# Altium PCB Mini_System.PcbDoc
Units mm, origin at the board's own origin, x right, y up, seen from the top; angles counter-clockwise.
Board outline 100 x 100 mm, 2 copper layers (Top Layer, Bottom Layer); 52 components, 62 nets, 208 pads, 18 vias.
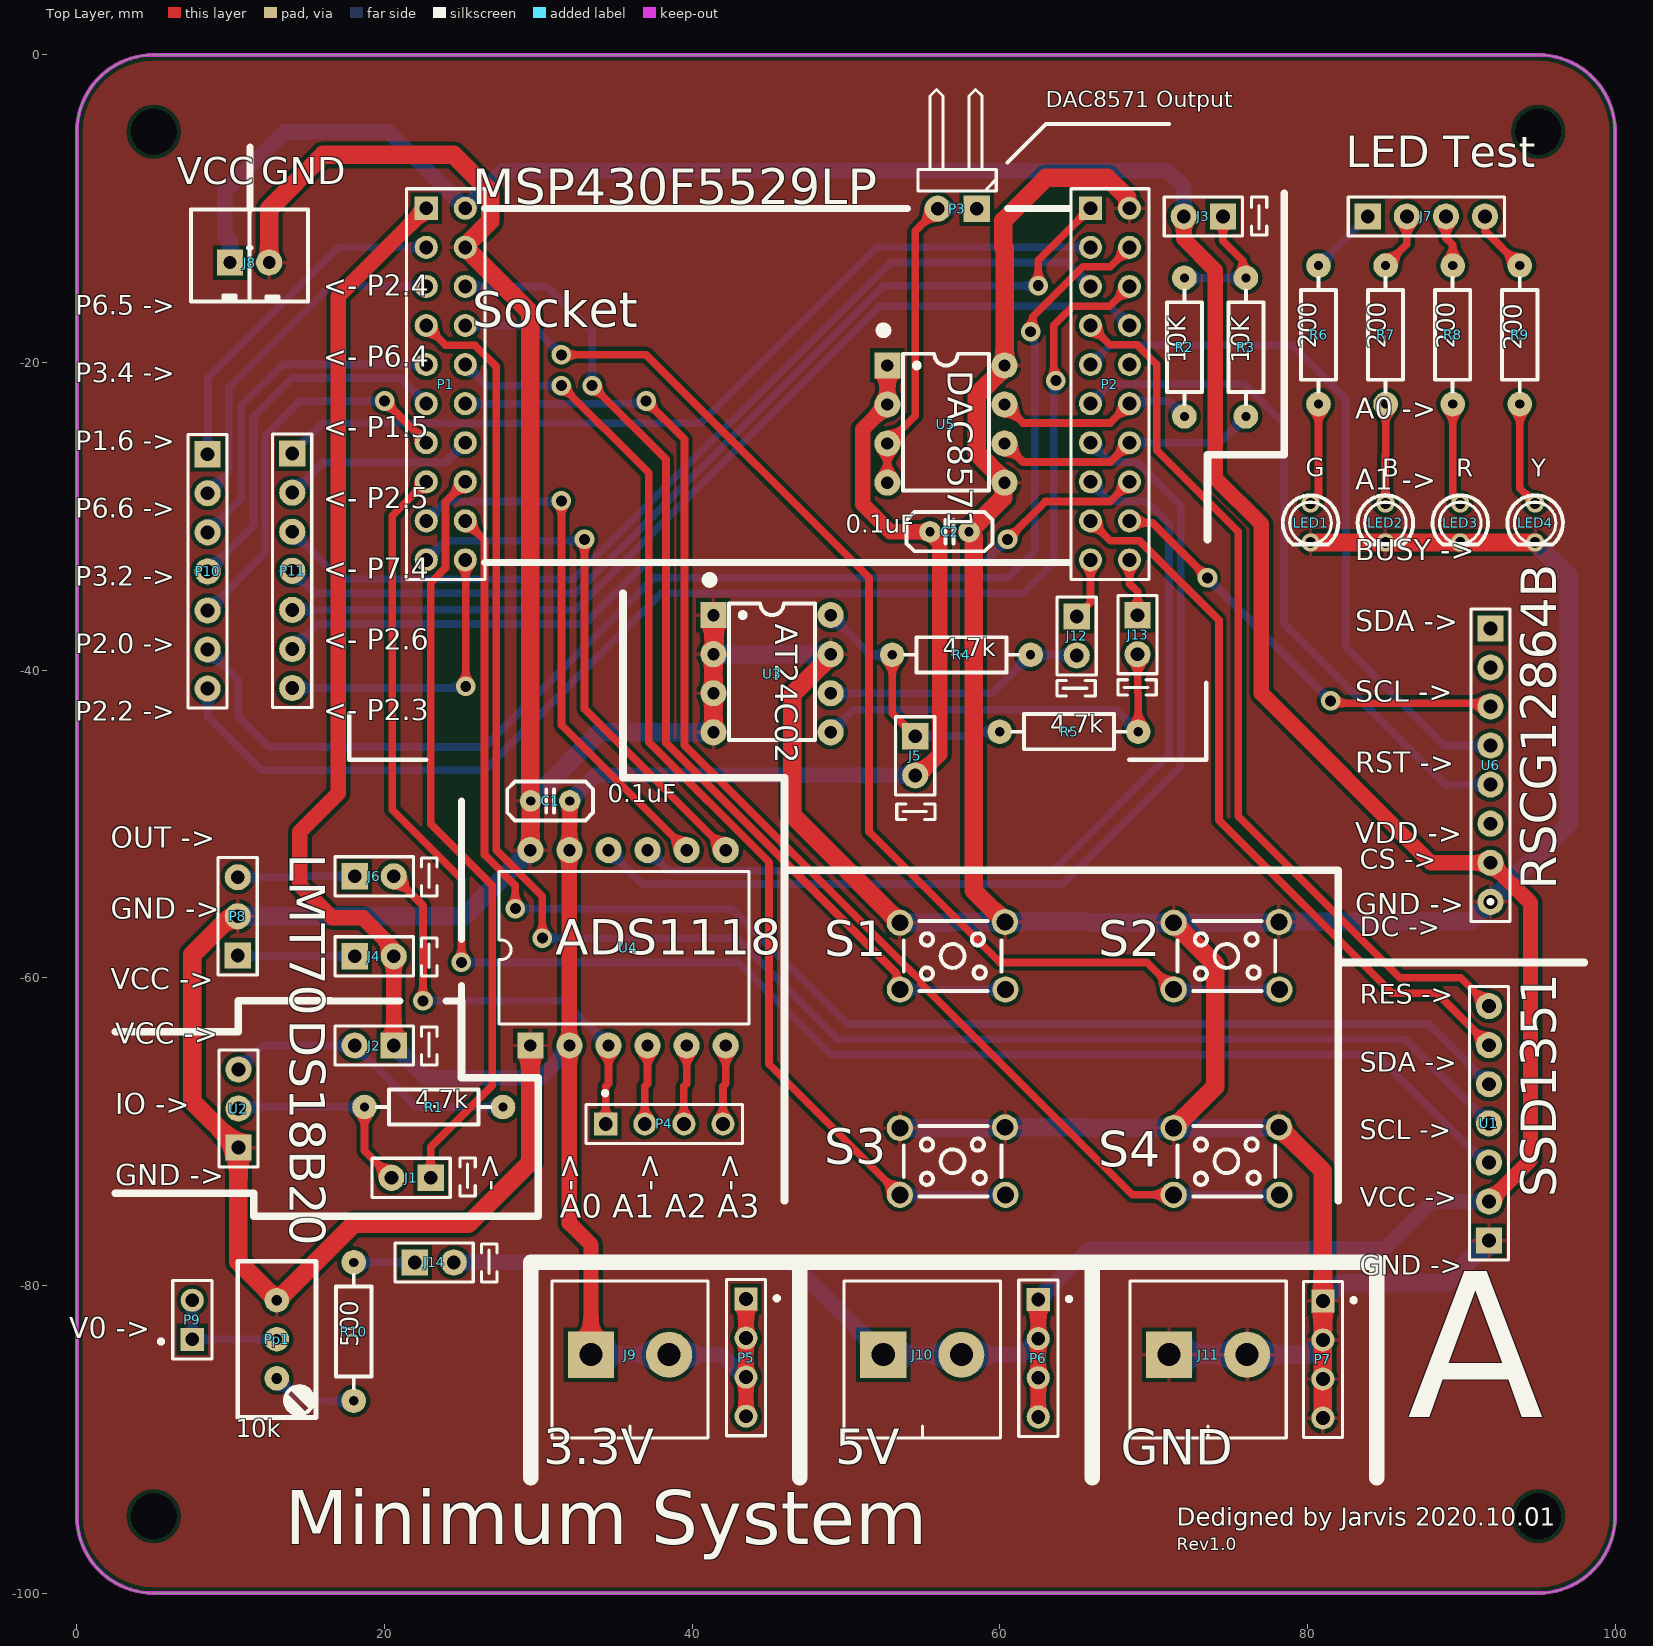
[diagram p0: Top Layer view]
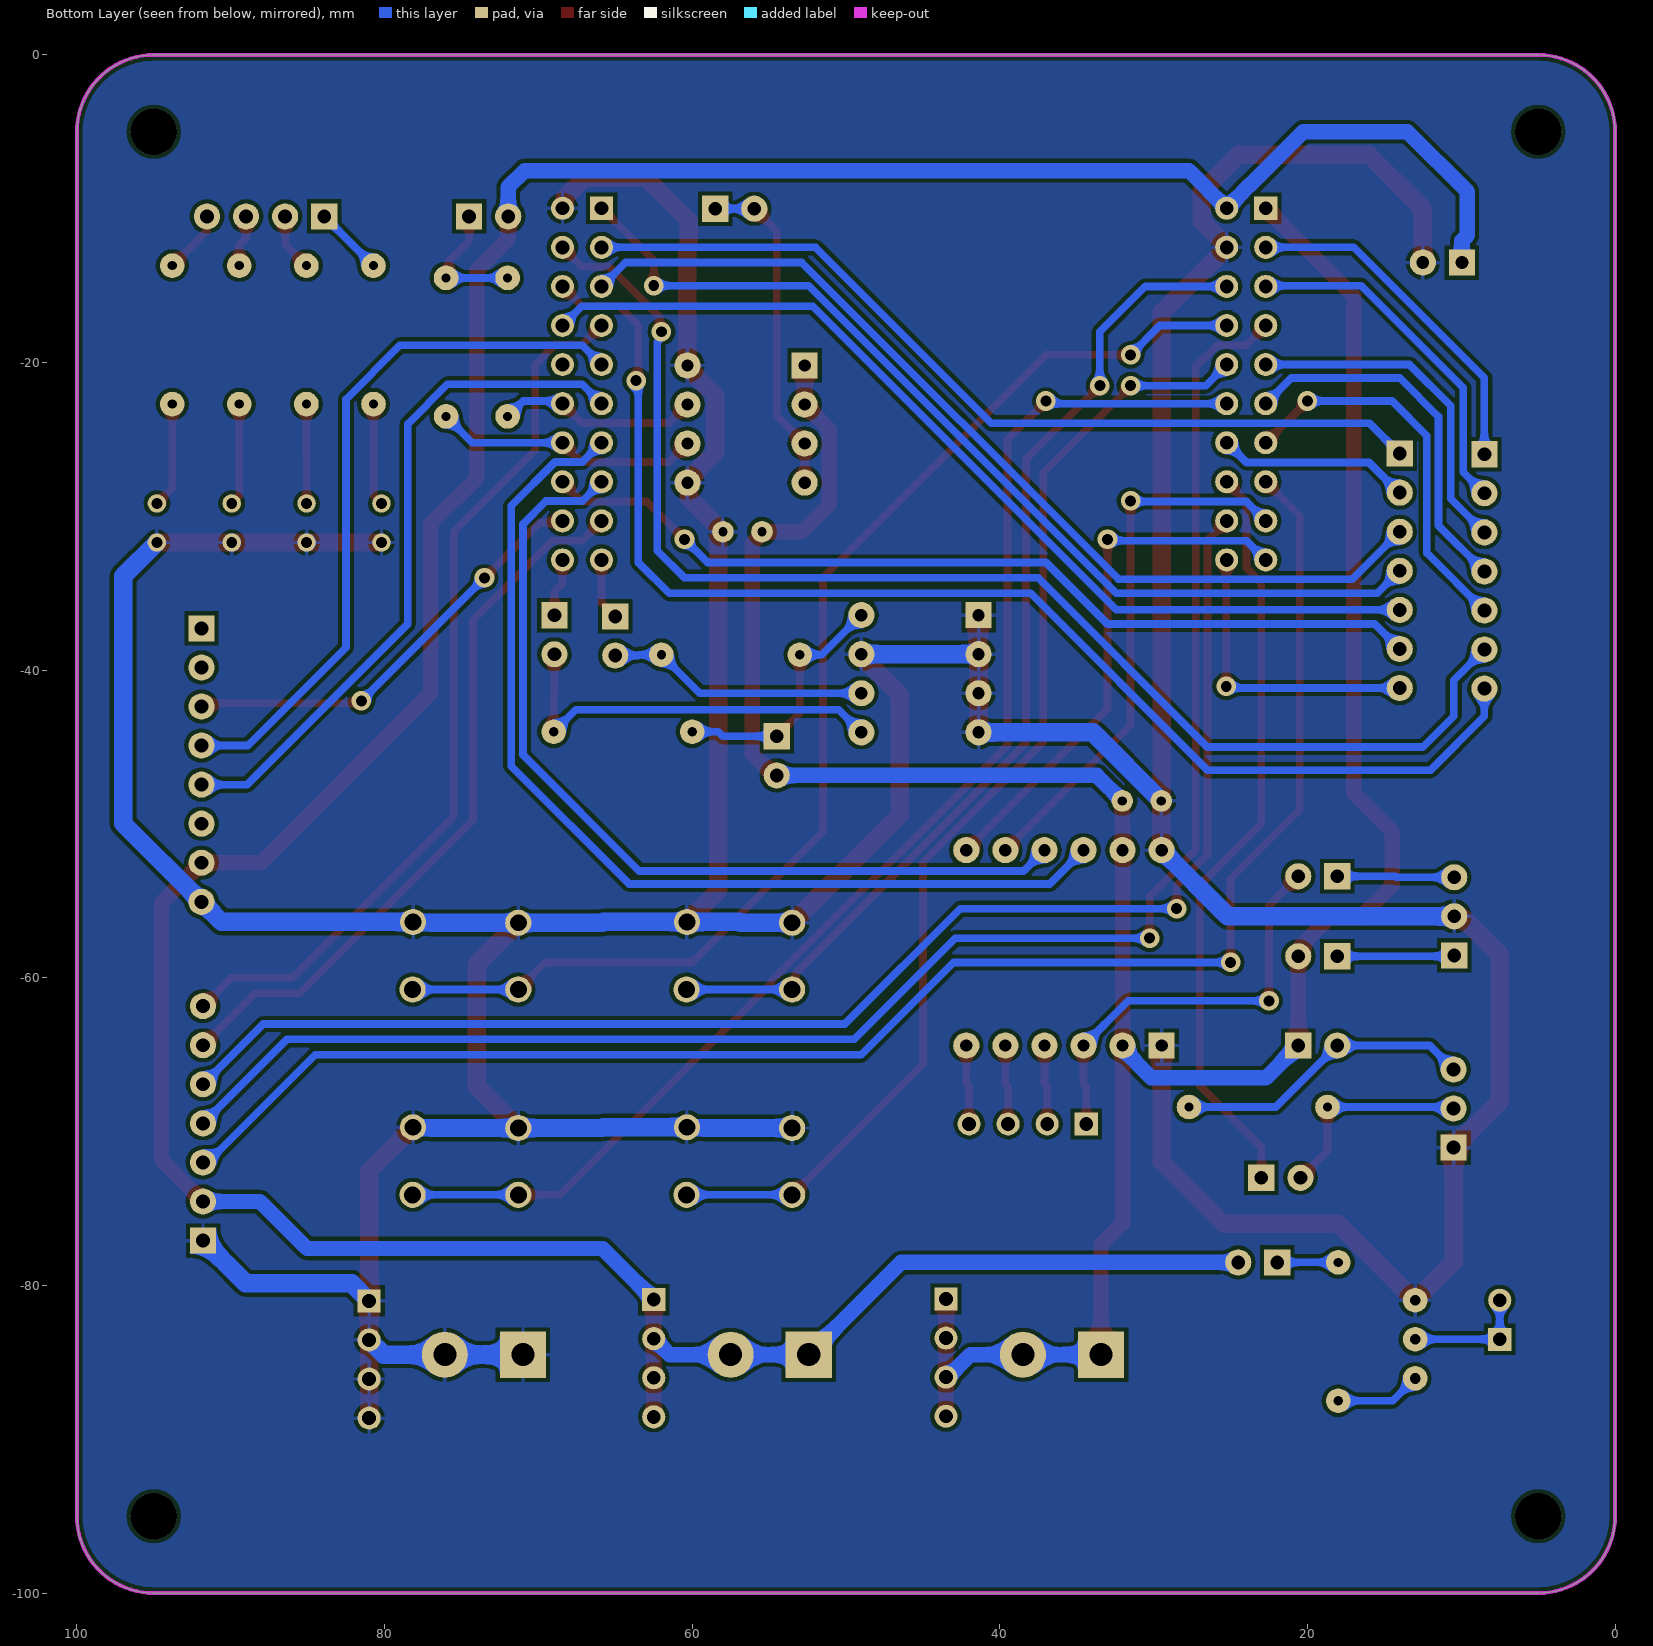
[diagram p1: Bottom Layer view, seen from below]

## Layer stack, top to bottom
Top Solder: solder mask 0.0102, Solder Resist, Dk 3.5
Top Layer: signal copper 0.0356
Dielectric 1: dielectric 0.32, FR-4, Dk 4.8
Bottom Layer: signal copper 0.0356
Bottom Solder: solder mask 0.0102, Solder Resist, Dk 3.5

## Board outline
5,-100 cw(c5,-95) 0,-95 0,-5 cw(c5,-5) 5,0 95,0 cw(c95,-5) 100,-5 100,-95 cw(c95,-95) 95,-100

## Design rules (kind name [scope] priority, off if disabled: settings)
Clearance [All] p1: gap=0.254 ignorepadtopadclearanceinfootprint=FALSE except(0: Arc-Hole Track-Hole SMDPad-Hole THPad-Hole Via-Hole Fill-Hole Poly-Hole Region-Hole Text-Hole)
PolygonConnect [All] p1: connectstyle=Relief reliefconductorwidth=0.254 reliefentries=4 polygonreliefangle="90 Angle" airgapwidth=0.254
RoutingVias [All] p1: holewidth=0.711 width=1.27 viastyle="Through Hole" minholewidth=0.711 minwidth=1.27 maxholewidth=0.711 maxwidth=1.27
SolderMaskExpansion [All] p1: expansion=0.102 istentingtop=FALSE
Width Width_3 [InNet('GND')] p1: maxlimit=1.2 minlimit=1.2 preferedwidth=1.2
Width Width_2 [InNet('5V')] p2: maxlimit=1 minlimit=1 preferedwidth=1
Width Width_1 [InNet('3V3')] p3: maxlimit=1 minlimit=1 preferedwidth=1
Width [All] p4: maxlimit=0.5 minlimit=0.5 preferedwidth=0.5
30 further rules are at their usual default settings.

## Components (designator, comment, footprint, x,y, rotation, side; value= is the part's Value field where it differs from the comment)
C1 "0.1uF" Capacitor-Disk-Middle 32.04,-48.5 r180 top locked value=100nF
C2 "0.1uF" Capacitor-Disk-Middle 58,-31 r180 top locked value=100nF
J1 "Jump" HDR-1x2 23,-73 r180 top locked
J2 "Jump" HDR-1x2 20.6,-64.4 r180 top locked
J3 "Jump" HDR-1x2 74.5,-10.5 r180 top locked
J4 "Jump" HDR-1x2 18.06,-58.6 r0 top locked
J5 "Jump" HDR-1x2 54.5,-44.3 r270 top locked
J6 "Jump" HDR-1x2 18.06,-53.4 r0 top locked
J7 "LED测试口" HDR-1X4_M 83.92,-10.5 r0 top locked
J8 "电源输入" XH2.54-2P 11.23,-13.5 r0 top locked
J9 "3.3V" WJ500V-5.08-2 35.96,-84.5 r0 top locked
J10 "5V" WJ500V-5.08-2 54.96,-84.5 r0 top locked
J11 "GND" WJ500V-5.08-2 73.54,-84.5 r0 top locked
J12 "Jump" HDR-1x2 65,-36.5 r270 top locked
J13 "Jump" HDR-1x2 68.957,-36.425 r270 top locked
J14 "Jump" HDR-1x2 21.96,-78.5 r0 top locked
LED1 "G" LED-R3-H5-SINGLE-G 80.2,-29.16 r270 top locked
LED2 "B" LED-R3-H5-SINGLE-B 85.067,-29.16 r270 top locked
LED3 "R" LED-R3-H5-SINGLE-R 89.933,-29.16 r270 top locked
LED4 "Y" LED-R3-H5-SINGLE-Y 94.8,-29.16 r270 top locked
P1 "Header 10X2" HDR2X10 22.711,-9.972 r270 top locked
P2 "Header 10X2" HDR2X10 65.891,-9.972 r270 top locked
P3 "DAC8571_Output" HDR-1X2_H 58.5,-10 r180 top locked
P4 "Header 4" HDR1X4 34.38,-69.5 r0 top locked
P5 "3.3V电源输出" HDR1X4 43.5,-80.88 r270 top locked
P6 "5V电源输出" HDR1X4 62.5,-80.92 r270 top locked
P7 "GND" HDR1X4 81,-81 r270 top locked
P8 "LMT70" HDR-1X3_M 10.457,-58.54 r90 top locked
P9 "Header 2" HDR1X2 7.5,-83.5 r90 top locked
P10 "Header 7" HDR-1X7_M 8.5,-25.96 r270 top locked
P11 "Header 7" HDR-1X7_M 14,-25.92 r270 top locked
Pp1 "10k" RP_3296 13,-86.04 r180 top locked
R1 "4.7k" "RS 1/4W" 23.2,-68.4 r180 top locked value=1K
R2 "10K" "RS 1/4W" 72,-19 r90 top locked value=1K
R3 "10K" "RS 1/4W" 76,-19 r90 top locked value=1K
R4 "4.7k" "RS 1/4W" 57.5,-39 r180 top locked value=1K
R5 "4.7k" "RS 1/4W" 64.5,-44 r180 top locked value=1K
R6 "200" "RS 1/4W" 80.72,-18.2 r90 top locked value=1K
R7 "200" "RS 1/4W" 85.08,-18.2 r90 top locked value=1K
R8 "200" "RS 1/4W" 89.44,-18.2 r90 top locked value=1K
R9 "200" "RS 1/4W" 93.8,-18.2 r90 top locked value=1K
R10 "500" "RS 1/4W" 18,-83 r270 top locked value=1K
S1 "S1" BUTTON_6*6 53.5,-56.42 r0 top locked
S2 "S2" BUTTON_6*6 71.304,-56.42 r0 top locked
S3 "S3" BUTTON_6*6 53.5,-69.763 r0 top locked
S4 "S4" BUTTON_6*6 71.304,-69.763 r0 top locked
U1 "SSD1351" HDR-1X7_M 91.8,-77.08 r90 top locked
U2 "DS18B20" HDR-1X3_Y 10.5,-71.04 r90 top locked
U3 "AT24C02" DIP8-300_MH 45.19,-40.23 r0 top locked
U4 "ADS1118" DIP12 29.48,-64.4 r90 top locked
U5 "DAC8571" DIP8-300_MH 56.5,-24 r0 top locked
U6 "RSCG12864B" HDR-1X8_M 91.9,-37.28 r270 top locked

## Footprints (in the part's own frame and the unit in brackets; to place one, negate y for a bottom-side part, rotate by r counter-clockwise, add the part's x,y. Pads: shape width x height; smd on the part's side, far side on the other; paste and mask are expansions set on the pad)
BUTTON_6*6 [mm] "轻触按键"
  round 1.7 hole 1.1: 1(0,0) 1(6.842,0.051) 2(0,-4.343) 2(6.867,-4.343)
  silkscreen extent 0.25,-4.44 6.6,0.13, body extent -0.48,-5.01 7.49,0.99, height 5.26
Capacitor-Disk-Middle [mm]
  round 1.4 hole 0.6: 1(0,0) 2(2.54,0)
  silkscreen extent -1.52,-1.27 4.06,1.27, body extent -1.23,-1.1 3.77,1, height 7
DIP8-300_MH [mm] "带底座 9.4*7.6*3.8(长宽高）"
  rect 1.7x1.7 hole 0.8: 1(-3.81,3.81)
  round 1.7 hole 0.8: 2(-3.81,1.27) 3(-3.81,-1.27) 4(-3.81,-3.81) 5(3.81,-3.81) 6(3.81,-1.27) 7(3.81,1.27) 8(3.81,3.81)
  silkscreen extent -4.32,-4.32 2.79,6.35, body extent -5,-5.19 5,5.19, height 7.7
DIP12 [mm]
  rect 1.7x1.7 hole 0.8: 1(0,0)
  round 1.7 hole 0.8: 2(0,-2.54) 3(0,-5.08) 4(0,-7.62) 5(0,-10.16) 6(0,-12.7) 7(12.7,-12.7) 8(12.7,-10.16) 9(12.7,-7.62) 10(12.7,-5.08) 11(12.7,-2.54) 12(12.7,0)
  silkscreen extent 1.4,-14.22 11.3,2.04
HDR1X2 [mm] "Connector; Header; 2 Position"
  rect 1.5x1.5 hole 0.9: 1(0,0)
  round 1.5 hole 0.9: 2(2.54,0)
  silkscreen extent -1.27,-1.27 3.81,2.17, body extent -1.27,-1.27 3.81,1.27, height 8.54
HDR1X4 [mm] "Connector; Header; 4 Position"
  rect 1.5x1.5 hole 0.9: 1(0,0)
  round 1.5 hole 0.9: 2(2.54,0) 3(5.08,0) 4(7.62,0)
  silkscreen extent -1.27,-1.27 8.89,2.14, body extent -1.27,-1.27 8.89,1.27, height 8.54
HDR2X10 [mm] "Connector; Header; 10x2 Position"
  rect 1.5x1.5 hole 0.9: 1(0,0)
  round 1.5 hole 0.9: 2(0,2.54) 3(2.54,0) 4(2.54,2.54) 5(5.08,0) 6(5.08,2.54) 7(7.62,0) 8(7.62,2.54) 9(10.16,0) 10(10.16,2.54) 11(12.7,0) 12(12.7,2.54) 13(15.24,0) 14(15.24,2.54) 15(17.78,0) 16(17.78,2.54) 17(20.32,0) 18(20.32,2.54) 19(22.86,0) 20(22.86,2.54)
  silkscreen extent -1.27,-1.27 24.13,3.81, body extent -1.27,-1.27 24.13,3.81, height 8.54
HDR-1x2 [mm] "排针，2脚"
  rect 1.7x1.7 hole 0.9: 1(0,0)
  round 1.7 hole 0.9: 2(2.54,0)
  silkscreen extent -1.27,-1.27 3.81,1.27, body extent -1.27,-1.27 3.81,1.27, height 8.5
HDR-1X2_H [mm] "弯脚排针，2脚"
  rect 1.7x1.7 hole 0.9: 1(0,0)
  round 1.7 hole 0.9: 2(2.54,0)
  silkscreen extent -1.27,-7.76 3.81,-1.14, body extent -1.27,-7.77 3.81,1.27, height 4.85
HDR-1X3_M [mm] "排母，3脚"
  rect 1.7x1.7 hole 0.9: 1(0,0)
  round 1.7 hole 0.9: 2(2.54,0) 3(5.08,0)
  silkscreen extent -1.27,-1.27 6.35,1.27, body extent -1.27,-1.27 6.35,1.27, height 8.5
HDR-1X3_Y [mm] "圆孔排母，3脚"
  rect 1.7x1.7 hole 0.9: 1(0,0)
  round 1.7 hole 0.9: 2(2.54,0) 3(5.08,0)
  silkscreen extent -1.27,-1.27 6.35,1.27, body extent -1.27,-1.27 6.35,1.27, height 4.31
HDR-1X4_M [mm] "排母，4脚"
  rect 1.7x1.7 hole 0.9: 1(0,0)
  round 1.7 hole 0.9: 2(2.54,0) 3(5.08,0) 4(7.62,0)
  silkscreen extent -1.27,-1.27 8.89,1.27, body extent -1.27,-1.27 8.89,1.27, height 8.5
HDR-1X7_M [mm] "排母，7脚"
  rect 1.7x1.7 hole 0.9: 1(0,0)
  round 1.7 hole 0.9: 2(2.54,0) 3(5.08,0) 4(7.62,0) 5(10.16,0) 6(12.7,0) 7(15.24,0)
  silkscreen extent -1.27,-1.27 16.51,1.27, body extent -1.27,-1.27 16.51,1.27, height 8.5
HDR-1X8_M [mm] "排母，8脚"
  rect 1.7x1.7 hole 0.9: 1(0,0)
  round 1.7 hole 0.9: 2(2.54,0) 3(5.08,0) 4(7.62,0) 5(10.16,0) 6(12.7,0) 7(15.24,0) 8(17.78,0)
  silkscreen extent -1.27,-1.27 19.05,1.27, body extent -1.27,-1.27 19.05,1.27, height 8.5
LED-R3-H5-SINGLE-B [mm]
  round 1.2 hole 0.7: 1(0,0) 2(2.54,0)
  silkscreen extent -0.53,-1.8 2.68,1.8, body extent -0.73,-2 2.79,2, height 5.2
LED-R3-H5-SINGLE-G [mm]
  round 1.2 hole 0.7: 1(0,0) 2(2.54,0)
  silkscreen extent -0.53,-1.8 2.68,1.8, body extent -0.73,-2 2.79,2, height 5.2
LED-R3-H5-SINGLE-R [mm]
  round 1.2 hole 0.7: 1(0,0) 2(2.54,0)
  silkscreen extent -0.53,-1.8 2.68,1.8, body extent -0.73,-2 2.79,2, height 5.2
LED-R3-H5-SINGLE-Y [mm]
  round 1.2 hole 0.7: 1(0,0) 2(2.54,0)
  silkscreen extent -0.53,-1.8 2.68,1.8, body extent -0.73,-2 2.79,2, height 5.2
RP_3296 [mm] "电位器"
  round 1.6 hole 0.7: 1(0,0) 2(0,-2.54) 3(0,-5.08)
  silkscreen extent -2.54,-7.62 2.54,2.54, body extent -2.41,-7.23 2.39,2.3, height 11.55
"RS 1/4W" [mm] "直插色环电阻，脚距9mm，直径2.3mm"
  round 1.6 hole 0.6: 1(-4.5,0) 2(4.5,0)
  silkscreen extent -3.68,-1.14 3.68,1.14, body extent -4.72,-1.16 4.73,1.16, height 2.32
WJ500V-5.08-2 [mm]
  rect 3x3 hole 1.5: 1(-2.54,0)
  round 3 hole 1.5: 2(2.54,0)
  silkscreen extent -5.08,-5.41 5.08,4.8, body extent -5.67,-4.8 5.07,4.7, height 15
XH2.54-2P [mm]
  rect 1.7x1.7 hole 0.83: 1(-1.27,0)
  round 1.7 hole 0.83: 2(1.27,0)
  silkscreen extent -3.81,-2.54 3.79,3.46, body extent -3.72,-2.37 3.68,3.38, height 7

## Part data
C1 C2: library part "Cap Nicklon", "CBB聚乙烯薄膜电容", Voltage=63V, Published=8-Jun-2000, Publisher="Altium Limited", Revision="July-2002: Re-released for DXP Platform.", 实物样品照片=https://item.taobao.com/item.htm?spm=a230r.1.14.32.21fd24b7VWml4d&id=37914290992&ns=1&abbucket=13#detail
J7: library part HDR1X4, "排针", SuppliersPartNumber=C57369, ComponentLink1Description=供应商链接, ComponentLink1URL=http://www.szlcsc.com/product/details_58403.html, price=0.2, Supplier=LC
J8: library part CON2, "连接器"
J9 J10 J11: library part KF128-5.08MM-2P, "接线端子", ComponentLink1Description=供应商链接, ComponentLink1URL=https://detail.tmall.com/item.htm?spm=a1z10.5-b.w4011-14865958799.193.B0p41N&id=45905508377&rn=e90e7252b5175cd006380c5c01151190&abbucket=9, price=0.5, Supplier=Farpu
LED1: library part LED-3-G, "Typical INFRARED GaAs LED", Published=8-Jun-2000, Publisher="Altium Limited", Revision="July-2002: Re-released for DXP Platform."
LED2: library part LED-3-B, "Typical INFRARED GaAs LED", Published=8-Jun-2000, Publisher="Altium Limited", Revision="July-2002: Re-released for DXP Platform."
LED3: library part LED-3-R, "Typical INFRARED GaAs LED", Published=8-Jun-2000, Publisher="Altium Limited", Revision="July-2002: Re-released for DXP Platform."
LED4: library part LED-3-Y, "Typical INFRARED GaAs LED", Published=8-Jun-2000, Publisher="Altium Limited", Revision="July-2002: Re-released for DXP Platform."
P1 P2: "Header, 10-Pin, Dual row", LatestRevisionDate=17-Jul-2002, LatestRevisionNote="Re-released for DXP Platform.", Publisher="Altium Limited"
P3: library part "Header 2", "Header, 2-Pin", LatestRevisionDate=17-Jul-2002, LatestRevisionNote="Re-released for DXP Platform.", Publisher="Altium Limited"
P4: "Header, 4-Pin", LatestRevisionDate=17-Jul-2002, LatestRevisionNote="Re-released for DXP Platform.", Publisher="Altium Limited"
P5 P6 P7: library part "Header 4", "Header, 4-Pin", LatestRevisionDate=17-Jul-2002, LatestRevisionNote="Re-released for DXP Platform.", Publisher="Altium Limited"
P8: library part "Header 3", "Header, 3-Pin", LatestRevisionDate=17-Jul-2002, LatestRevisionNote="Re-released for DXP Platform.", Publisher="Altium Limited"
P9: "Header, 2-Pin", LatestRevisionDate=17-Jul-2002, LatestRevisionNote="Re-released for DXP Platform.", Publisher="Altium Limited"
P10 P11: "Header, 7-Pin", LatestRevisionDate=17-Jul-2002, LatestRevisionNote="Re-released for DXP Platform.", Publisher="Altium Limited"
Pp1: library part RP_3296, "3296电位器", 购买链接=https://item.taobao.com/item.htm?spm=a230r.1.14.90.21641e34zQj3ul&id=19303265869&ns=1&abbucket=13#detail
R1 R2 R3 R4 R5 R6 R7 R8 R9 R10: library part Res2, "Resistor", LatestRevisionDate=17-Jul-2002, LatestRevisionNote="Re-released for DXP Platform.", PackageDescription="Axial Device, Thru-Hole; 2 Leads; 0.4 in Pin Spacing", PackageReference=AXIAL-0.4, Published=8-Jun-2000, Publisher="Altium Limited"
S1 S2 S3 S4: library part SW-PB, "Tactile Switch触觉开关", LatestRevisionDate=17-Jul-2002, LatestRevisionNote="Re-released for DXP Platform.", PackageReference=SPST-2, Published=24-Mar-1999, Publisher="Altium Limited"
U1: library part "1.5'OLED RGB SSD1351", "1.5寸彩色OLED"
U3: library part AT24C02BN-SP25-B, "2Kbit (256 x 8), 2-wire Bus Automotive Serial EEPROM with full memory Write Protect, 2.5V, 8-Pin SOIC, Bulk", Code_IPC=SOIC127P600-8, Code_JEDEC=MS-012-AA, ComponentLink1Description="Manufacturer Link", ComponentLink1URL=http://www.atmel.com/products/serial/default.asp, ComponentLink2Description=Datasheet, ComponentLink2URL=http://www.atmel.com/dyn/resources/prod_documents/doc8517.pdf, ComponentLink3Description="Atmel.com Home", ComponentLink3URL=http://www.atmel.com, DatasheetVersion="8517C,  Jan-2009", PackageDescription="8-Lead (0.150\" Wide Body), Plastic Gull Wing Small Outline (JEDEC SOIC)", PackageReference=8S1, PackageVersion="revC, Mar-2005", Published=20-Sep-2010, Publisher="Altium Limited"
U4: "16位ADC芯片，将模拟电压信号转化为数字信号供单片机处理"
U5: "16位DAC芯片，将数字量转化为模拟电压输出"

## Free pads (board coordinates)
  round 3 hole 3: 1(5,-95) 1(5,-5) 1(95,-95) 1(95,-5)

## Via types
v1: diameter 1.27, hole 0.711, Top Layer to Bottom Layer, 18 vias

## Nets (pads, with @x,y where several pads share a name; then routed paths per layer and width w, separated by ;. In a path a pad name is that pad's centre, name@x,y a point inside that pad or via, vN(x,y) a via of type N, cw(c..) or ccw(c..) an arc to the next point about the centre after c; other vN are vias at no path point)
3V3: C1.1 C2.2 J2.1 J4.2 J5.2 J9.1 J9.2 P1.1 P5.1 P5.2 P5.3 P5.4 U4.2 U4.11 U5.1 U5.2 | length 184.6
  Top Layer w1: J2.1 J4.2 20.466,-58.466 20.466,-57.966 18.606,-56.106 16.606,-56.106 14.5,-54 14.5,-50.5 17,-48 17,-15.683 P1.1 ; C1.1 32.04,-50.094 32.02,-50.114 U4.11 32,-51.72 32,-64.38 U4.2 32.02,-75.943 33.42,-77.343 J9.1 ; P5.4 P5.3 P5.2 P5.1 ; U5.1 U5.2 51.079,-24.341 51.079,-29.21 52.869,-31 C2.2 55.46,-31.108 56.104,-31.752 56.104,-45.462 55.567,-45.999 55.53,-45.999 54.689,-46.84 J5.2
  Bottom Layer w1: J2.1 22.7,-66.5 30.146,-66.5 31.179,-65.467 31.179,-65.43 32.02,-64.589 U4.2 ; C1.1 33.7,-46.84 J5.2 ; J9.1 J9.2 41.905,-84.5 43.365,-85.96 P5.3
5V: J3.2 J8.1 J10.1 J10.2 J14.2 P1.2 P6.1 P6.2 P6.3 P6.4 U1.2 U6.7 | length 231.4
  Top Layer w1: P6.4 P6.3 P6.2 P6.1 ; J3.2 71.96,-11.96 74,-14 74,-27.5 77,-30.5 77,-41.5 88.02,-52.52 U6.7 94.5,-55.12 94.5,-71.84 U1.2
  Bottom Layer w1: J8.1 9.96,-12.082 9.609,-11.732 9.609,-8.891 13.5,-5 20.279,-5 23.747,-8.468 23.773,-8.468 24.215,-8.91 24.215,-8.936 P1.2 27.702,-7.521 70.882,-7.521 71.96,-8.599 J3.2 ; J14.2 46.42,-78.5 J10.1 J10.2 61.46,-84.5 P6.2 ; P6.1 65.823,-77.597 85.039,-77.597 88.096,-74.54 U1.2
GND: C1.2 C2.1 J8.2 J11.1 J11.2 LED1.2 LED2.2 LED3.2 LED4.2 P1.4 P2.2 P7.1 P7.2 P7.3 P7.4 P8.2 Pp1.3 S1.1 S2.1 S3.1 S4.1 U1.1 U2.1 U3.1 U3.2 U3.3 U3.4 U3.7 U4.1 U4.12 U5.5 U5.8 U6.8 | length 416
  Top Layer w1.2: P8.2 10.361,-56.096 9.904,-56.096 7.5,-58.5 7.5,-68.04 U2.1 10.5,-78.46 Pp1.3 13.04,-80.96 18,-76 25.46,-76 29.48,-71.98 U4.1 ; J8.2 12.5,-10 16,-6.5 24.5,-6.5 26.873,-8.873 26.873,-10.809 25.251,-12.431 P1.4 29.465,-16.726 29.465,-48.465 C1.2 29.5,-50.094 29.48,-50.114 U4.12 ; U3.4 U3.3 U3.2 41.429,-38.911 41.429,-36.469 U3.1 ; U3.7 49,-39.09 46.5,-41.59 46.5,-49.42 S1.1@53.5,-56.42 ; S1.1@60.342,-56.369 58.297,-54.324 58.297,-31.351 58,-31.054 C2.1 60.214,-28.786 60.214,-27.906 U5.5 60.31,-27.68 58.5,-25.87 58.5,-22.13 60.31,-20.32 60.31,-12.544 60.233,-12.467 60.233,-10.767 63,-8 67,-8 68.281,-9.281 68.281,-9.741 68.431,-9.891 P2.2 ; S4.1@71.304,-69.763 74,-67.067 74,-59.116 S2.1@71.304,-56.42 ; S4.1@78.146,-69.713 81,-72.566 P7.1 P7.2 P7.3 P7.4 ; LED1.2 LED2.2 LED3.2 LED4.2
  Bottom Layer w1.2: P8.2 25.18,-56 U4.12 ; C1.2 33.96,-44.04 U3.4 ; U3.2 U3.7 ; S3.1@53.5,-69.763 59.207,-69.763 60.342,-69.713 65.786,-69.713 65.837,-69.763 71.304,-69.763 77.013,-69.763 S4.1@78.146,-69.713 ; S1.1@53.5,-56.42 56.871,-56.42 56.921,-56.369 60.342,-56.369 65.786,-56.369 65.837,-56.42 71.304,-56.42 77.013,-56.42 78.146,-56.369 90.591,-56.369 U6.8 97,-49.96 97,-33.9 LED4.2 ; J11.1 J11.2 80.04,-84.5 P7.2 ; P7.1 82.142,-79.858 89.022,-79.858 U1.1
LMT70_Out: J6.2 P4.1 U4.3 | length 27.3
  Top Layer w0.5: J6.2 22.5,-55.3 v1(22.5,-61.5) ; P4.1 34.38,-67.056 34.56,-66.876 U4.3
  Bottom Layer w0.5: v1(22.5,-61.5) 31.66,-61.5 U4.3
NetJ1_2: J1.2 R1.2 U2.2 | length 13.6
  Top Layer w0.5: R1.2 18.7,-71.24 J1.2
  Bottom Layer w0.5: U2.2 10.6,-68.4 R1.2
NetJ2_2: J2.2 R1.1 U2.3 | length 19.5
  Bottom Layer w0.5: U2.3 12.06,-64.4 J2.2 22.06,-68.4 R1.1
NetJ3_1: J3.1 R2.2 R3.2 | length 9
  Top Layer w0.5: J3.1 74.5,-12.08 75.79,-13.37 75.79,-14.29 R3.2
  Bottom Layer w0.5: R2.2@71.714,-14.5 R2.2 R3.2 R3.2@76.074,-14.5
NetJ4_1: J4.1 P8.1 | length 7.6
  Bottom Layer w0.5: P8.1 10.517,-58.6 J4.1
NetJ5_1: J5.1 R4.2 R5.2 U3.8 | length 16.6
  Top Layer w0.5: R4.2 53,-42.8 J5.1
  Bottom Layer w0.5: U3.8 51.58,-39 R4.2 ; J5.1 58.003,-44.3 58.303,-44 R5.2
NetJ6_1: J6.1 P8.3 | length 7.6
  Bottom Layer w0.5: P8.3 14.224,-53.46 14.284,-53.4 J6.1
NetJ7_1: J7.1 R6.2 | length 4.5
  Bottom Layer w0.5: R6.2 83.32,-11.1 J7.1
NetJ7_2: J7.2 R7.2 | length 3.8
  Top Layer w0.5: R7.2 86.46,-12.32 J7.2
NetJ7_3: J7.3 R8.2 | length 3.4
  Top Layer w0.5: J7.3 89,-11.904 89.44,-12.344 R8.2
NetJ7_4: J7.4 R9.2 | length 4.1
  Top Layer w0.5: J7.4 91.54,-11.44 R9.2
NetJ12_2: J12.2 R4.1 U3.6 | length 17.1
  Bottom Layer w0.5: U3.6 59.5,-41.5 R4.1 63.475,-39 63.515,-39.04 J12.2
NetJ13_2: J13.2 R5.1 U3.5 | length 26.3
  Top Layer w0.5: J13.2 68.957,-41.461 69,-41.504 R5.1
  Bottom Layer w0.5: U3.5 50.47,-42.57 67.57,-42.57 R5.1
NetJ14_1: J14.1 R10.1 | length 4
  Bottom Layer w0.5: R10.1 J14.1
NetLED1_1: LED1.1 R6.1 | length 6.7
  Top Layer w0.5: LED1.1 80.72,-28.64 R6.1
NetLED2_1: LED2.1 R7.1 | length 6.5
  Top Layer w0.5: LED2.1 85.067,-25.959 85.08,-25.945 R7.1
NetLED3_1: LED3.1 R8.1 | length 6.7
  Top Layer w0.5: R8.1 89.44,-28.667 LED3.1
NetLED4_1: LED4.1 R9.1 | length 6.9
  Top Layer w0.5: R9.1 93.8,-28.16 LED4.1
NetP3_1: P3.1 P3.2 U5.3 U5.4 | length 21.7
  Top Layer w0.5: U5.4 U5.3 54.508,-23.452 54.508,-11.452 P3.2
  Bottom Layer w0.5: P3.2 P3.1
NetP4_2: P4.2 U4.4 | length 5.2
  Top Layer w0.5: P4.2 36.92,-67.056 37.1,-66.876 U4.4
NetP4_3: P4.3 U4.5 | length 5.2
  Top Layer w0.5: P4.3 39.46,-67.056 39.64,-66.876 U4.5
NetP4_4: P4.4 U4.6 | length 5.2
  Top Layer w0.5: P4.4 42,-67.056 42.18,-66.876 U4.6
NetP9_1: P9.1 P9.2 Pp1.2 | length 8
  Bottom Layer w0.5: P9.2 P9.1 Pp1.2
NetPp1_1: Pp1.1 R10.2 | length 5.6
  Bottom Layer w0.5: Pp1.1 14.46,-87.5 R10.2
P1.2: P2.11 U6.5 | length 44.9
  Bottom Layer w0.5: P2.11 67.145,-21.418 75.918,-21.418 78.5,-24 78.5,-37 88.94,-47.44 U6.5
P1.3: P2.9 U6.4 | length 46.8
  Bottom Layer w0.5: P2.9 67.145,-18.878 79,-18.878 82.5,-22.378 82.5,-38.5 88.9,-44.9 U6.4
P1.4: P2.7 U1.7 | length 58.3
  Top Layer w0.5: P2.7 67.145,-18.846 68.918,-18.846 70.204,-20.132 70.204,-25.704 75.5,-31 75.5,-49.5 86,-60 89.96,-60 U1.7
P1.5: P2.5 P11.3 | length 62.3
  Bottom Layer w0.5: P11.3 17.086,-34.086 32.281,-34.086 52.867,-13.5 64.339,-13.5 P2.5
P1.6: P1.9 P10.3 | length 22.3
  Bottom Layer w0.5: P10.3 10.678,-28.862 10.678,-22.822 13.368,-20.132 P1.9
P2.0: P2.4 P10.6 | length 86.6
  Top Layer w0.5: v1(62,-18) 62.147,-17.853 62.147,-17.022 65.404,-13.766 67.177,-13.766 P2.4
  Bottom Layer w0.5: P10.6 10.5,-40.66 10.5,-43 12.5,-45 26.5,-45 37.5,-34 60.5,-34 62.277,-32.223 62.277,-18.678 62.147,-18.548 62.147,-18.147 v1(62,-18)
P2.2: P2.6 P10.7 | length 85.4
  Top Layer w0.5: v1(63.639,-21.182) 63.498,-21.041 63.498,-17.568 64.728,-16.338 67.145,-16.338 P2.6
  Bottom Layer w0.5: P10.7 8.5,-43 12,-46.5 26.5,-46.5 38,-35 61.5,-35 63.498,-33.002 63.498,-21.323 v1(63.639,-21.182)
P2.3: P2.18 U6.3 | length 28.5
  Top Layer w0.5: P2.18 68.57,-30.431 69.931,-30.431 v1(73.5,-34) ; v1(81.5,-42) 81.647,-42.147 91.687,-42.147 U6.3
  Bottom Layer w0.5: v1(73.5,-34) v1(81.5,-42)
P2.4: P2.3 P11.1 | length 57.4
  Bottom Layer w0.5: P11.1 15.968,-23.952 40.548,-23.952 51.988,-12.512 P2.3
P2.5: P2.1 P11.4 | length 63.8
  Top Layer w0.5: v1(62.5,-15) 62.5,-13.363 P2.1
  Bottom Layer w0.5: P11.4 15.46,-35 32.434,-35 52.434,-15 v1(62.5,-15)
P2.6: P2.16 P11.6 | length 58.9
  Top Layer w0.5: v1(60.5,-31.5) 62.962,-29.038 67.145,-29.038 P2.16
  Bottom Layer w0.5: P11.6 15.62,-37 33,-37 37,-33 59,-33 v1(60.5,-31.5)
P2.7: P1.15 U1.3 | length 106.2
  Top Layer w0.5: P1.15 20.5,-29.963 20.5,-49.066 25,-53.566 v1(25,-59)
  Bottom Layer w0.5: v1(25,-59) 43,-59 49,-65 84.5,-65 91.5,-72 U1.3
P3.0: P2.12 R2.1 U5.7 | length 12.9
  Top Layer w0.5: U5.7 61.506,-23.926 67.177,-23.926 P2.12
  Bottom Layer w0.5: P2.12@68.603,-22.5 70.985,-22.5 71.985,-23.5 R2.1
P3.1: P2.14 R3.1 U5.6 | length 17.4
  Top Layer w0.5: U5.6 61.506,-26.466 67.177,-26.466 P2.14
  Bottom Layer w0.5: P2.14 74.288,-25.212 R3.1
P3.2: P1.13 P10.5 | length 25.4
  Top Layer w0.5: v1(20,-22.5) P1.13
  Bottom Layer w0.5: P10.5 12.242,-32.378 12.242,-24.758 14.5,-22.5 v1(20,-22.5)
P3.3: P1.7 U1.4 | length 110.6
  Top Layer w0.5: P1.7 22.711,-17.621 23.968,-18.878 25.878,-18.878 27.259,-20.259 27.259,-51.693 30.263,-54.697 v1(30.263,-57.425)
  Bottom Layer w0.5: v1(30.263,-57.425) 42.896,-57.425 49.471,-64 86.34,-64 U1.4
P3.4: P1.5 P10.2 | length 23
  Bottom Layer w0.5: P10.2 9.868,-27.132 9.868,-21.632 16.5,-15 22.659,-15 P1.5
P3.5: P1.20 P11.7 | length 19.6
  Top Layer w0.5: P1.20 25.279,-32.86 v1(25.279,-41.049)
  Bottom Layer w0.5: P11.7 25.168,-41.16 v1(25.279,-41.049)
P3.6: P1.18 U1.5 | length 94.6
  Top Layer w0.5: P1.18 26.505,-31.546 26.505,-52.005 28.5,-54 v1(28.5,-55.5)
  Bottom Layer w0.5: v1(28.5,-55.5) 42.571,-55.5 50.071,-63 87.88,-63 U1.5
P3.7: P2.17 U1.6 | length 47.6
  Top Layer w0.5: P2.17 67.177,-31.578 69.078,-31.578 74.246,-36.746 74.246,-49.746 85.5,-61 88.42,-61 U1.6
P4.0: P2.15 U4.9 | length 58.8
  Bottom Layer w0.5: U4.9 38.461,-53.061 63.439,-53.061 71,-45.5 71,-30.5 69.507,-29.007 67.146,-29.007 P2.15
P4.1: P1.19 U4.7 | length 34.8
  Top Layer w0.5: v1(33,-31.5) 33,-42.52 U4.7
  Bottom Layer w0.5: P1.19 23.965,-31.578 32.922,-31.578 v1(33,-31.5)
P4.2: P1.17 U4.8 | length 35.4
  Top Layer w0.5: v1(31.5,-29) 31.5,-43.56 U4.8
  Bottom Layer w0.5: P1.17 23.965,-29.038 31.462,-29.038 v1(31.5,-29)
P4.3: P2.13 U4.10 | length 65.8
  Bottom Layer w0.5: U4.10 36.759,-53.899 64.101,-53.899 71.754,-46.246 71.754,-29.302 68.918,-26.466 67.145,-26.466 P2.13
P6.0: P1.6 S1.2 | length 67.4
  Top Layer w0.5: v1(33.5,-21.5) 38.303,-26.303 38.303,-44.737 53.284,-59.717 53.284,-60.547 S1.2@53.5,-60.763
  Bottom Layer w0.5: P1.6 30.552,-15.052 33.5,-18 v1(33.5,-21.5) ; S1.2@53.5,-60.763 S1.2@60.367,-60.763
P6.1: P1.8 S2.2 | length 80.5
  Top Layer w0.5: v1(31.5,-19.5) 37,-19.5 51.5,-34 51.5,-50.5 60,-59 69.541,-59 S2.2@71.304,-60.763
  Bottom Layer w0.5: P1.8 29.592,-17.592 v1(31.5,-19.5) ; S2.2@71.304,-60.763 S2.2@78.172,-60.763
P6.2: P1.10 S3.2 | length 75.4
  Top Layer w0.5: v1(31.5,-21.5) 37.169,-27.169 37.169,-44.669 45,-52.5 45,-65.607 S3.2@53.5,-74.107
  Bottom Layer w0.5: P1.10 26.619,-21.5 v1(31.5,-21.5) ; S3.2@53.5,-74.107 S3.2@60.367,-74.107
P6.3: P1.12 S4.2 | length 86.1
  Top Layer w0.5: v1(37,-22.5) 39.5,-25 39.5,-44.867 54.042,-59.409 54.061,-59.409 54.854,-60.203 54.854,-60.354 68.607,-74.107 S4.2@71.304,-74.107
  Bottom Layer w0.5: P1.12 36.62,-22.672 36.792,-22.5 v1(37,-22.5) ; S4.2@71.304,-74.107 S4.2@78.172,-74.107
P6.4: P1.14 P11.2 | length 12.6
  Bottom Layer w0.5: P11.2@13.992,-28.46 14.04,-28.46 16.002,-26.498 23.965,-26.498 P1.14
P6.5: P1.3 P10.1 | length 22.7
  Bottom Layer w0.5: P10.1@8.5,-25.975 8.5,-21 16.988,-12.512 P1.3
P6.6: P1.11 P10.4 | length 24.3
  Bottom Layer w0.5: P10.4 11.488,-30.592 11.488,-23.512 14,-21 21.039,-21 P1.11
P7.0: J1.1 P1.16 | length 49.5
  Top Layer w0.5: J1.1 23,-71 27,-67 27,-54 23,-50 23,-34.316 23.965,-33.351 23.965,-29.038 P1.16
P7.4: P2.8 P11.5 | length 63.1
  Bottom Layer w0.5: P11.5 32.42,-36.08 52.168,-16.332 67.171,-16.332 P2.8
P8.1: J13.1 P2.20 | length 3.8
  Top Layer w0.5: P2.20 68.431,-34.373 68.957,-34.9 J13.1
P8.2: J12.1 P2.19 | length 4
  Top Layer w0.5: J12.1 65.891,-35.609 P2.19
pads on no net: P2.10 U6.1 U6.2 U6.6

## Polygon pours and split planes (outlines as drawn)
GND on Bottom Layer "GND_L02_P001" (solid, remove dead copper, pour order 1): 5,-100 cw(c5,-95) 0,-95 0,-5 cw(c5,-5) 5,0 95,0 cw(c95,-5) 100,-5 100,-95 cw(c95,-95) 95,-100
GND on Top Layer "GND_L01_P000" (solid, remove dead copper, pour order 0): 5,-100 cw(c5,-95) 0,-95 0,-5 cw(c5,-5) 5,0 95,0 cw(c95,-5) 100,-5 100,-95 cw(c95,-95) 95,-100

## Keep-outs
Keep-Out Layer:
  the board outline again, w0.254

## Silkscreen, mask and mechanical layers (free items; w line width, h text height)
Top Overlay:
  lines w0.2: 22.4,-65 22.4,-65.672 23.4,-65.672 23.4,-65 ; 22.4,-63.8 22.4,-63.2 23.4,-63.2 23.4,-63.8 ; 22.4,-59.2 22.4,-59.872 23.4,-59.872 23.4,-59.2 ; 22.4,-58 22.4,-57.4 23.4,-57.4 23.4,-58 ; 22.4,-54 22.4,-54.672 23.4,-54.672 23.4,-54 ; 22.4,-52.8 22.4,-52.2 23.4,-52.2 23.4,-52.8 ; 22.902,-65.119 22.902,-63.594 ; 22.902,-59.319 22.902,-57.794 ; 22.902,-54.119 22.902,-52.594 ; 24.9,-73.5 24.9,-74.172 25.9,-74.172 25.9,-73.5 ; 24.9,-72.3 24.9,-71.7 25.9,-71.7 25.9,-72.3 ; 25.402,-73.619 25.402,-72.094 ; 26.3,-79.1 26.3,-79.773 27.3,-79.773 27.3,-79.1 ; 26.3,-77.9 26.3,-77.3 27.3,-77.3 27.3,-77.9 ; 26.802,-79.219 26.802,-77.694 ; 53.694,-49.198 55.219,-49.198 ; 53.9,-49.7 53.3,-49.7 53.3,-48.7 53.9,-48.7 ; 55.1,-49.7 55.772,-49.7 55.772,-48.7 55.1,-48.7 ; 64.124,-41.177 65.649,-41.177 ; 64.33,-41.679 63.73,-41.679 63.73,-40.679 64.33,-40.679 ; 65.53,-41.679 66.203,-41.679 66.203,-40.679 65.53,-40.679 ; 68.089,-41.12 69.614,-41.12 ; 68.295,-41.622 67.695,-41.622 67.695,-40.622 68.295,-40.622 ; 69.495,-41.622 70.168,-41.622 70.168,-40.622 69.495,-40.622 ; 76.352,-11.117 76.352,-11.717 77.352,-11.717 77.352,-11.117 ; 76.352,-9.917 76.352,-9.245 77.352,-9.245 77.352,-9.917 ; 76.85,-11.324 76.85,-9.799
  lines w0.25: 60.5,-7 63,-4.5 71,-4.5
  lines w0.3: 17.712,-45.833 17.712,-42.832 ; 17.712,-45.832 22.711,-45.832 ; 68.421,-45.832 73.423,-45.832 ; 73.421,-40.909 73.424,-40.909 ; 73.421,-40.832 73.423,-40.832 73.423,-45.816
  lines w0.45: 11.22,-12.54 11.246,-12.54 ; 11.246,-10.04 11.246,-6 11.246,-8.306 ; 16.5,-61.5 20,-61.5 21,-61.5 ; 24,-61.5 25,-61.5 25,-60.5 ; 25,-57.5 25,-48.5 ; 26.5,-33 64.5,-33 ; 26.5,-10 54,-10 ; 60.5,-10 64.5,-10
  lines w0.5: 2.5,-74 11.5,-74 11.5,-75.5 30,-75.5 30,-66.5 25,-66.5 ; 2.5,-63.5 3.5,-63.5 10.5,-63.5 10.5,-61.5 16.5,-61.5 ; 35.5,-35 35.5,-47 46,-47 46,-74.5 ; 46,-53 82,-53 82,-59 ; 73.5,-31.5 73.5,-26 78.5,-26 78.5,-9 ; 82,-74.5 82,-59 ; 91.9,-55.06 91.904,-55.06 ; 98,-59 82,-59 ; 25,-66.5 25,-61.5 25,-66.5
  lines w1: 29.5,-92.5 29.5,-78.5 47,-78.5 ; 47,-92.5 47,-78.5 ; 66,-92.5 66,-78.5 ; 84.5,-92.5 84.5,-78.5 66,-78.5 ; 47,-78.5 66,-78.5
  text "A" at 26.087,2361.487 h32 r270
  text "DAC8571 Output" at 63,-3.758 h1.8
  text "LED Test" at 82.5,-7.977 h3.5
  text "VCC" at 6.5,-8.981 h3
  text "GND" at 12,-8.981 h3
  text "MSP430F5529LP /  / Socket" at 25.71,-18.5 h4
  text "P6.5 -> /  / P3.4 -> /  / P1.6 -> /  / P6.6 -> /  / P3.2 -> /  / P2.0 -> /  / P2.2 ->" at -0.1,-43.72 h2.2
  text "<- P2.4 /  / <- P6.4 /  / <- P1.5 /  / <- P2.5 /  / <- P7.4 /  / <- P2.6 /  / <- P2.3" at 16,-43.72 h2.3
  text "A0 -> /  / A1 -> /  / BUSY -> /  / SDA -> /  / SCL -> /  / RST -> /  / VDD -> /  / GND ->" at 83.1,-56.32 h2.3
  text "OUT -> /  / GND -> /  / VCC ->" at 2.2,-61.2 h2.3
  text "-> /  / -> /  / -> /  / ->" at 43.659,-73.884 h2.6 r90
  text "VCC -> /  / IO -> /  / GND ->" at 2.5,-73.935 h2.3
  text "A0 A1 A2 A3" at 31.4,-76.125 h2.6
  text "CS -> /  / DC -> /  / RES -> /  / SDA -> /  / SCL -> /  / VCC -> /  / GND ->" at 83.4,-79.72 h2.2
  text "V0 ->" at -0.5,-83.882 h2.3
  text "A" at 86.5,-92 h18
  text "Dedigned by Jarvis 2020.10.01" at 71.5,-96 h2
  text "Rev1.0" at 71.5,-97.5 h1.4
  text "Minimum System" at 13.5,-98 h6

## Dimensions
5,0 to 5,-100 on Top Overlay
0,-5 to 100,-5 on Top Overlay